# Altium PCB ExpansionBoard.PcbDoc
Units mil, origin at the board's own origin, x right, y up, seen from the top; angles counter-clockwise.
Board outline 2512.03 x 2180.03 mil, 4 copper layers (Top Layer, Mid-GND, Mid-PWR, Bottom Layer), stack 63.5 mil thick; 78 components, 50 nets, 306 pads, 103 vias.
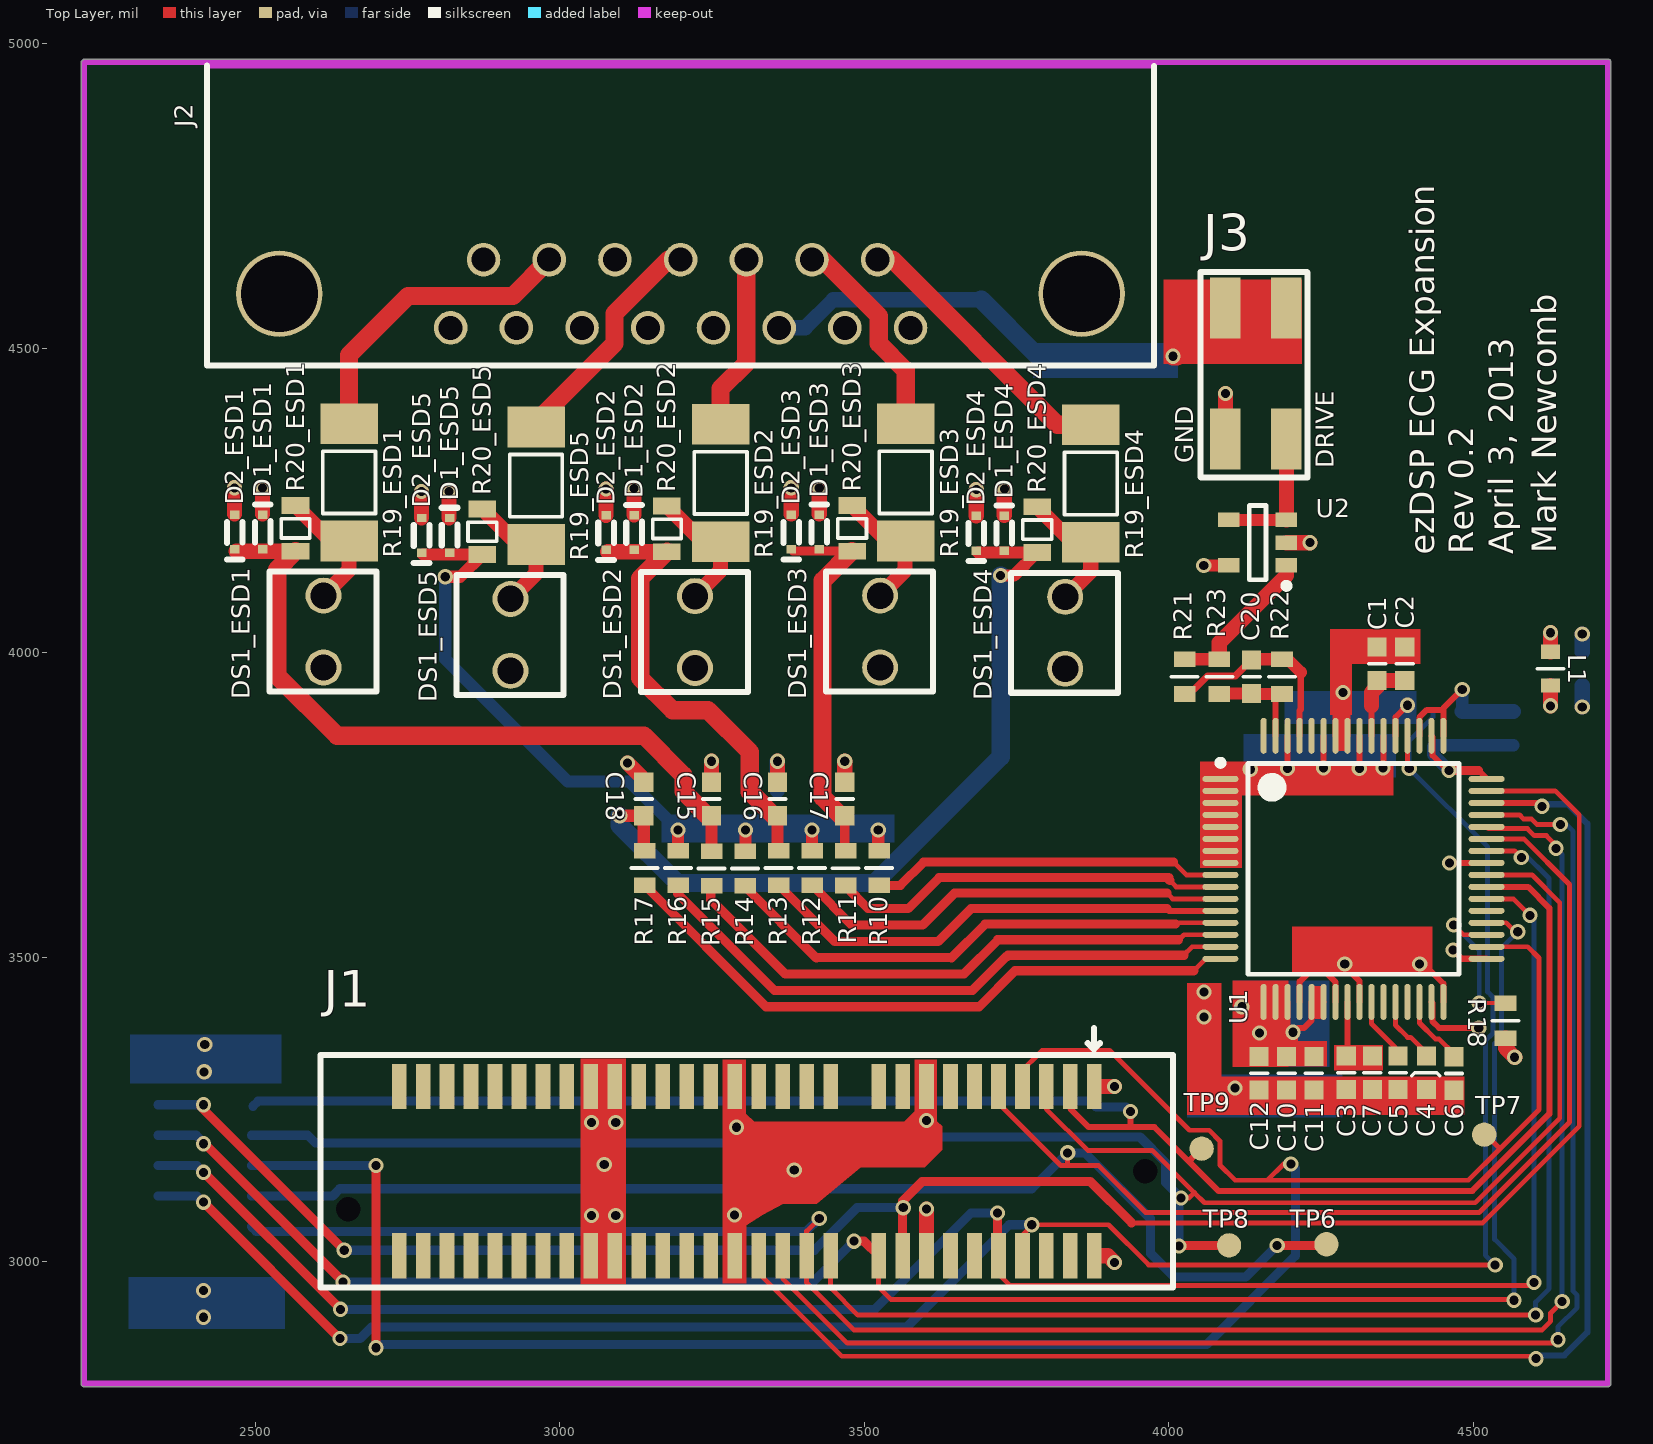
[diagram p0: Top Layer view]
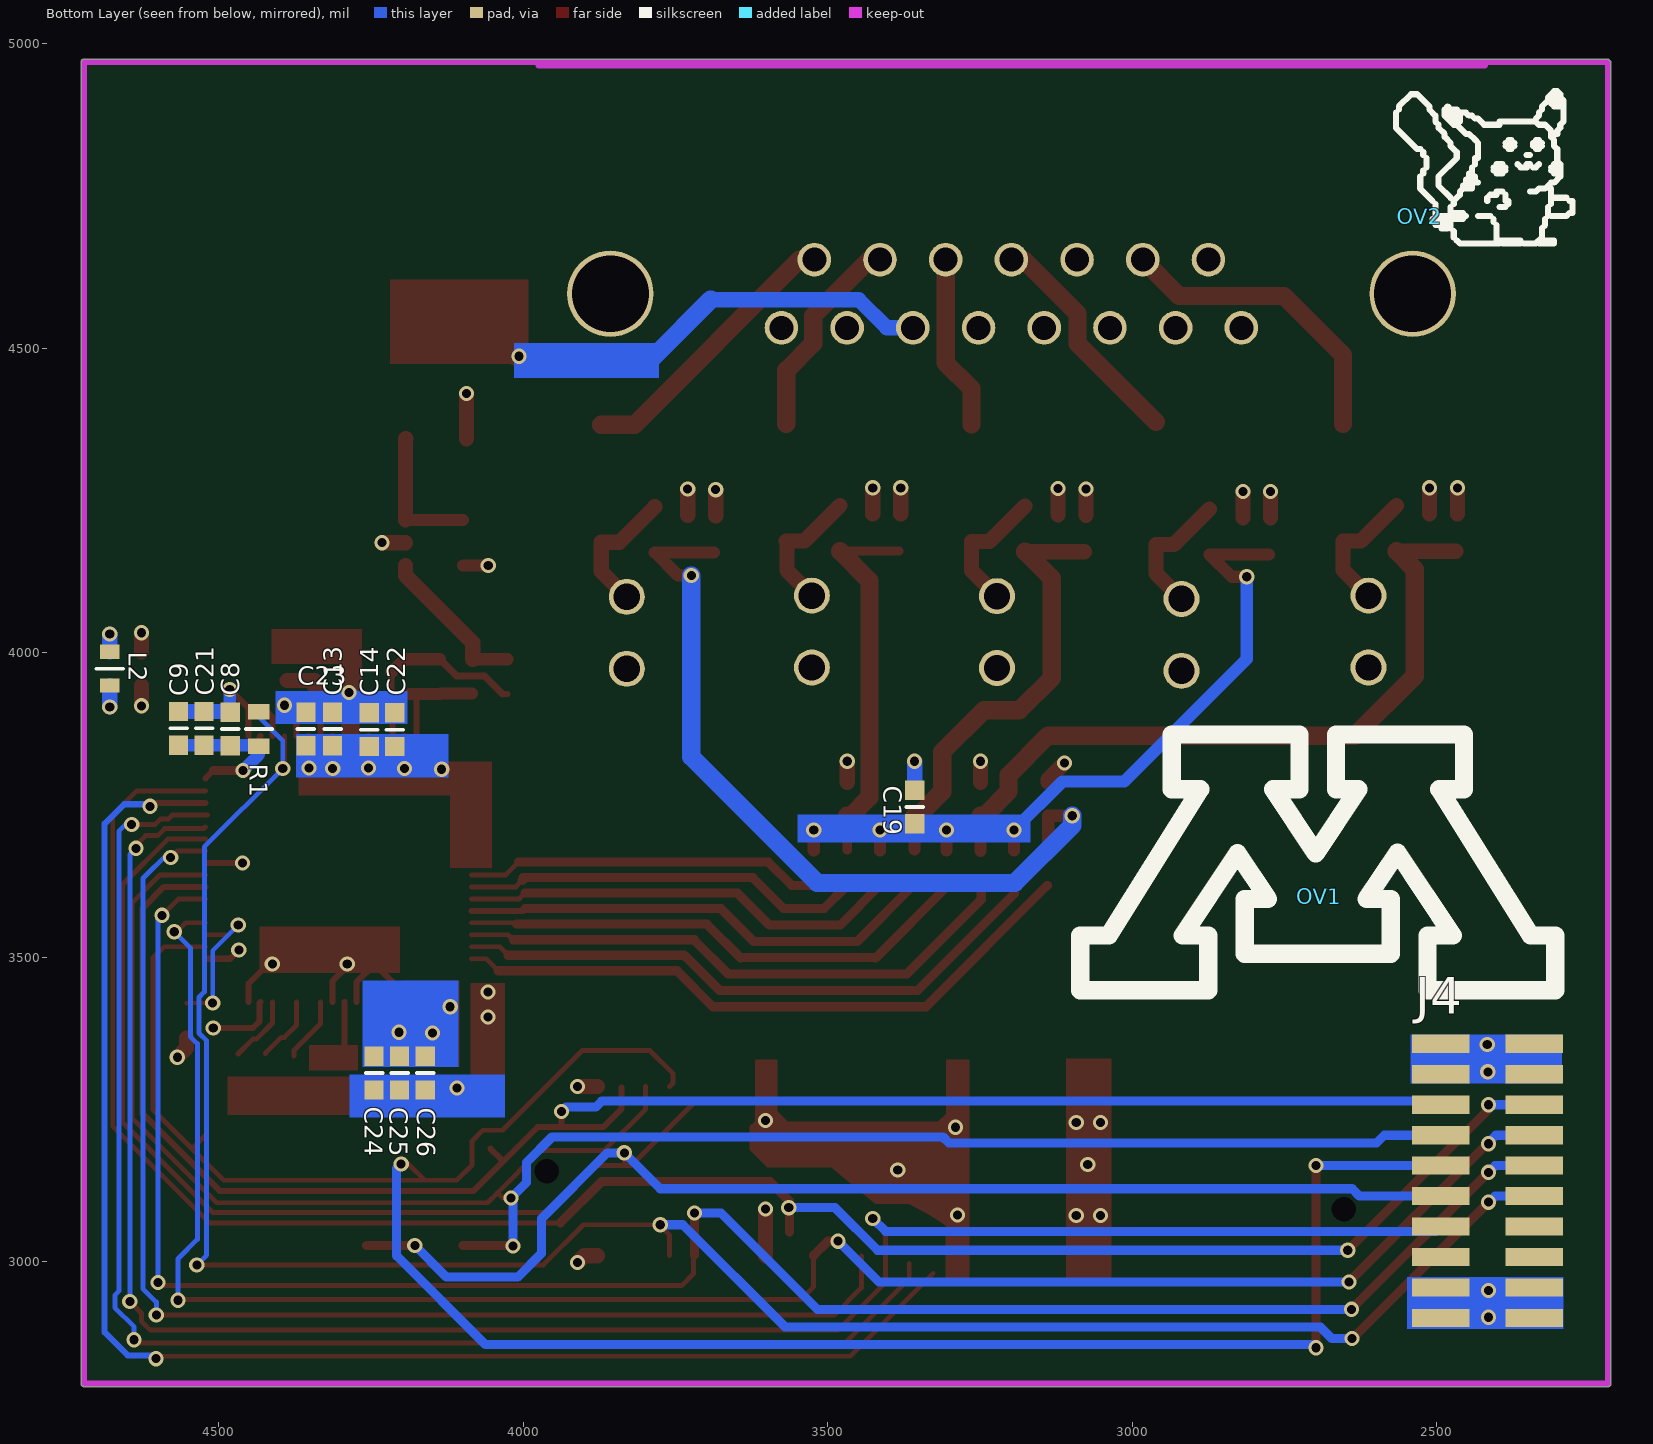
[diagram p1: Bottom Layer view, seen from below]
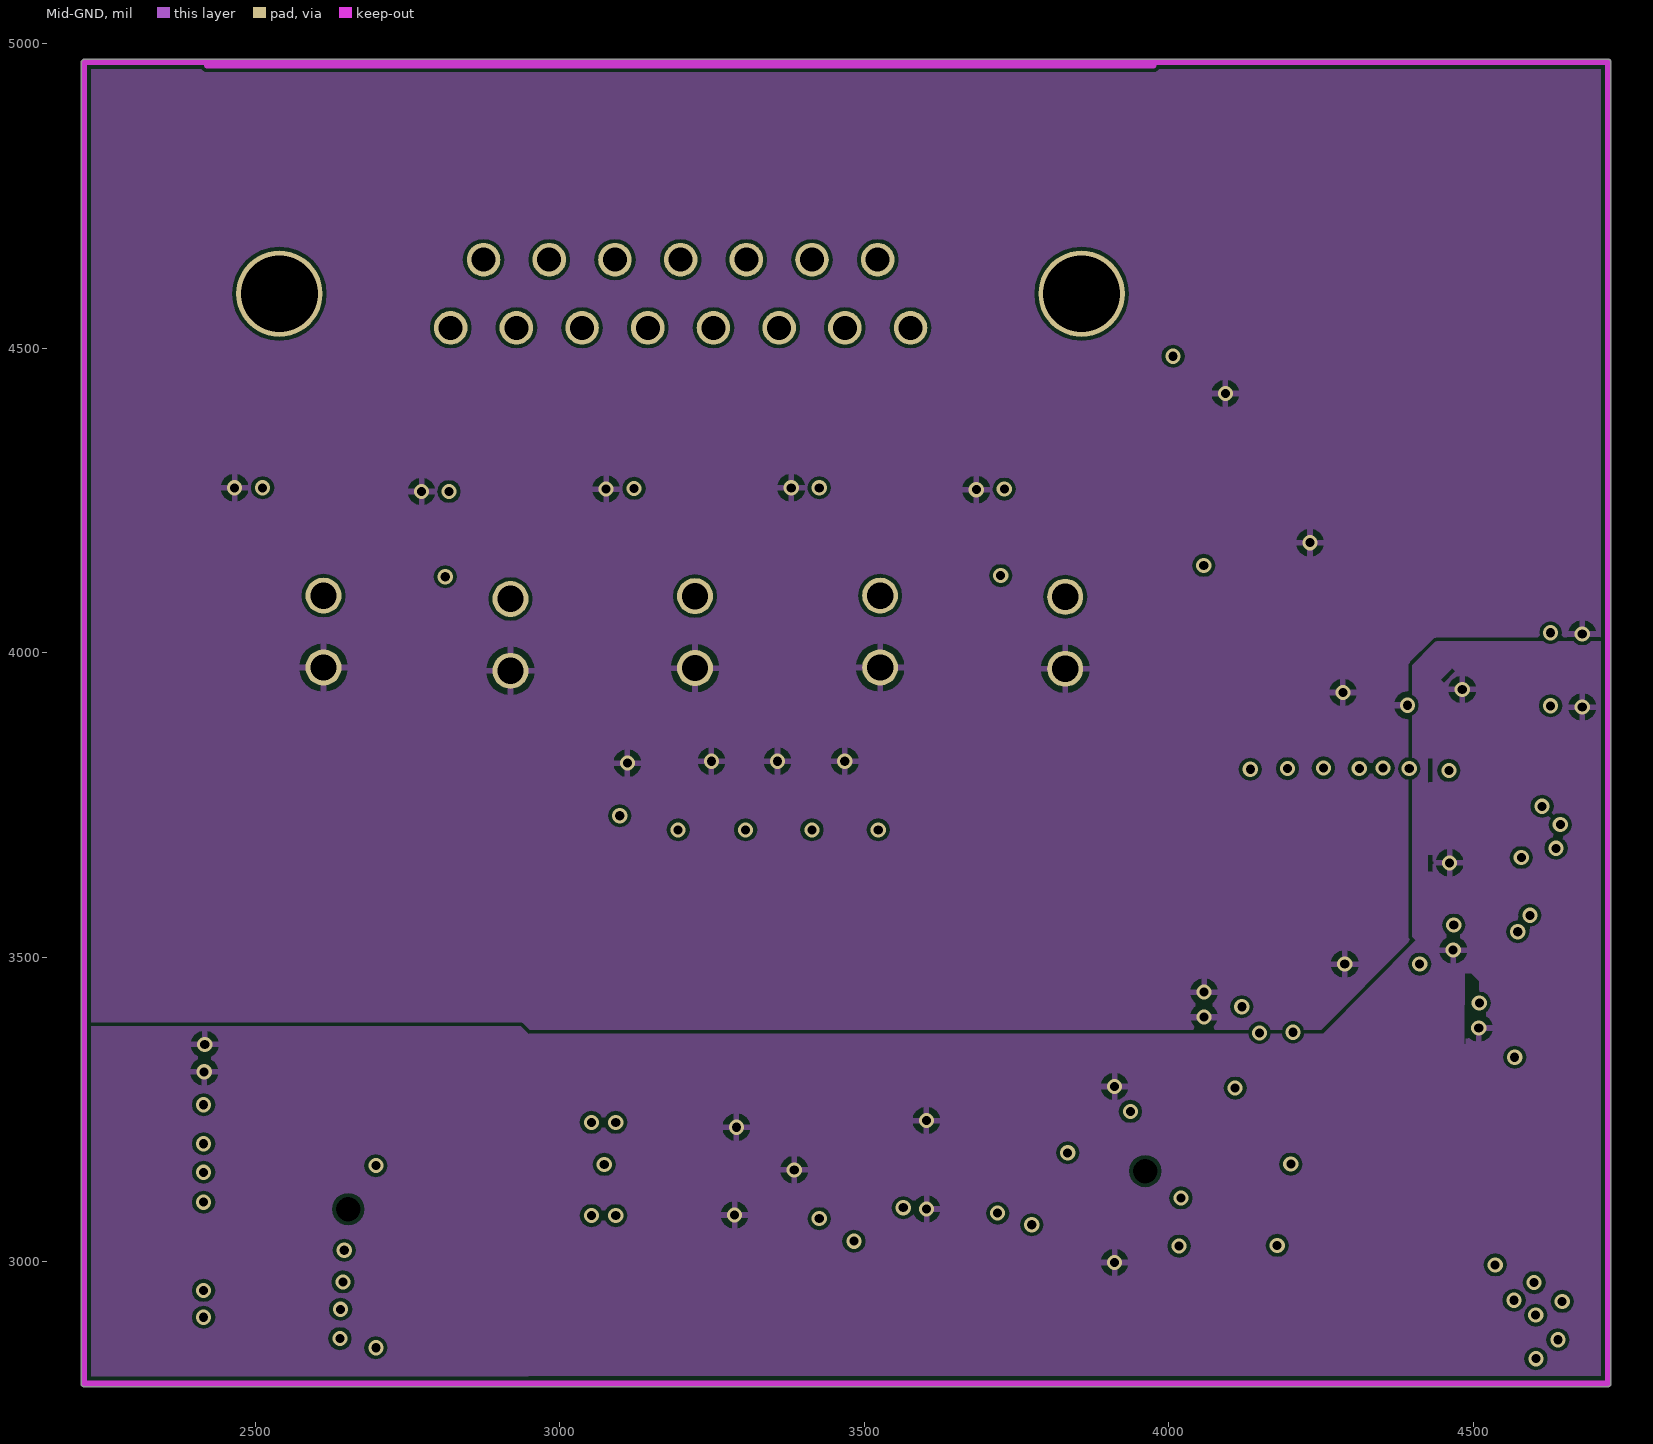
[diagram p2: Mid-GND]
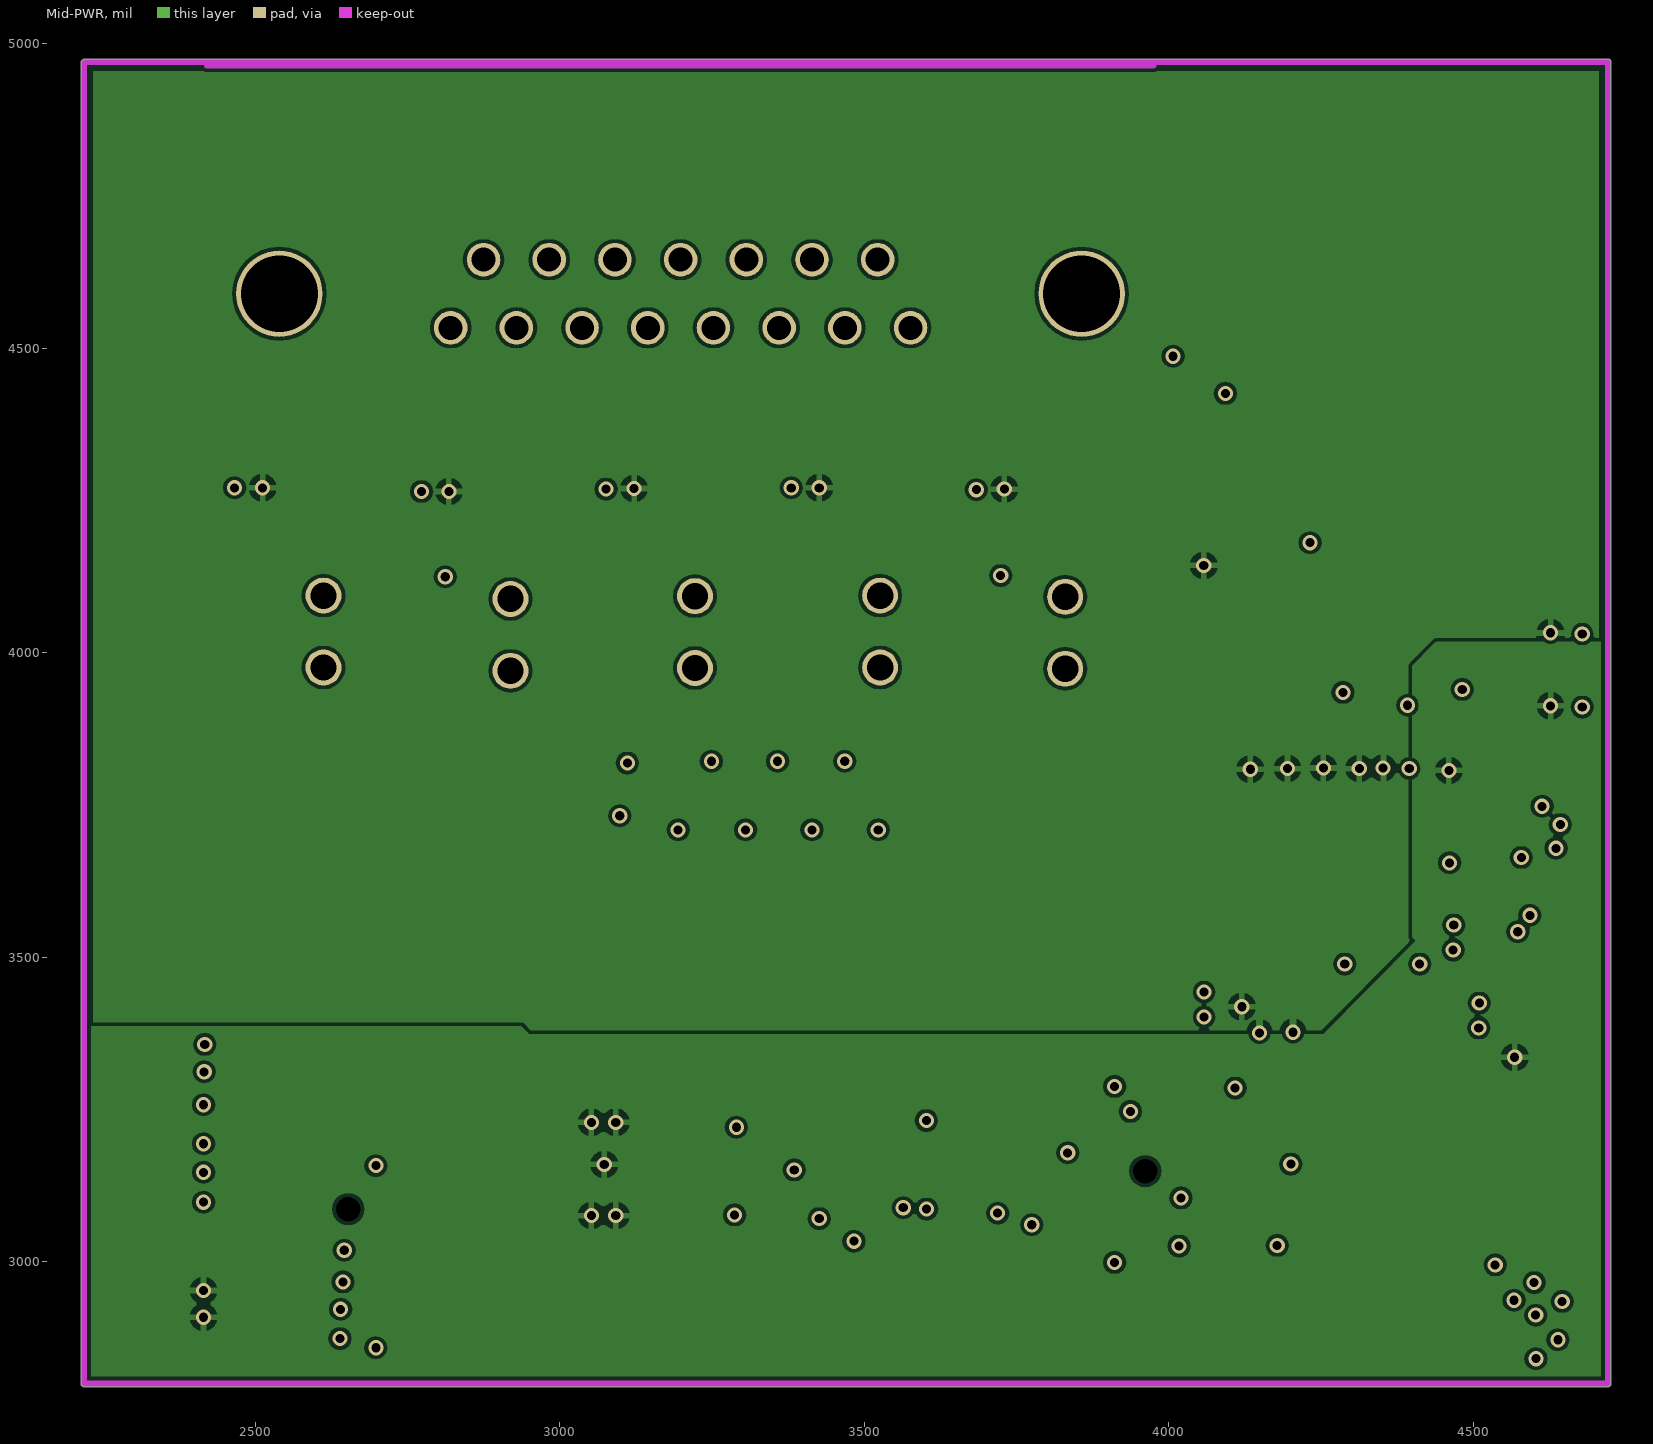
[diagram p3: Mid-PWR]

## Layer stack, top to bottom
Top Layer: signal copper 1.35
Dielectric: core 9.3, FR-4, Dk 4.8
Mid-GND: signal copper 1.35
Dielectric: prepreg 39, FR-4, Dk 4.8
Mid-PWR: signal copper 1.35
Dielectric: core 9.8, FR-4, Dk 4.8
Bottom Layer: signal copper 1.35

## Board outline
2213.99,2800 2213.99,4969 cw(c2219,4969) 2215.99,4973.01 cw(c2220,4970) 2220,4975.02 4721,4975.02 cw(c4721,4970) 4726.02,4970 4726.02,2800 cw(c4721,2800) 4721,2794.99 2219,2794.99 cw(c2219,2800)

## Design rules (kind name [scope] priority, off if disabled: settings)
Clearance Clearance_1 [All] p1: gap=6
Clearance TQFP_64_Rule [HasFootprint('TQFP_64_HD') vs HasFootprint('TQFP_64_HD')] p2: gap=4
Clearance "Polygon Pour" [(IsRegion AND InNet('AGND') AND OnLayer('Mid-GND')) vs (IsRegion AND InNet('DGND') AND OnLayer('Mid-GND'))] p3: gap=15
HoleSize [All] p1: absolutevalues=TRUE maxlimit=100 minlimit=15 maxpercent=80.000 minpercent=20.000
MinimumAnnularRing [All] p1: minimumring=5
PolygonConnect [All] p1: connectstyle=Relief reliefconductorwidth=10 reliefentries=4 polygonreliefangle="90 Angle" airgapwidth=10
RoomDefinition ESD5 [InComponentClass('ESD5')] p1: confinementstyle=ConfineIn formatcopy=TRUE lockcomponents=FALSE outline 2732.5,3912.54 3016.5,3912.54 3016.5,4432.54 2732.5,4432.54
RoomDefinition ESD4 [InComponentClass('ESD4')] p2: confinementstyle=ConfineIn formatcopy=TRUE lockcomponents=FALSE outline 3646,3916 3930,3916 3930,4436 3646,4436
RoomDefinition ESD3 [InComponentClass('ESD3')] p3: confinementstyle=ConfineIn formatcopy=TRUE lockcomponents=FALSE outline 3341.5,3918 3625.5,3918 3625.5,4438 3341.5,4438
RoomDefinition ESD2 [InComponentClass('ESD2')] p4: confinementstyle=ConfineIn formatcopy=TRUE lockcomponents=FALSE outline 3037,3917.14 3321,3917.14 3321,4437.14 3037,4437.14
RoomDefinition ESD1 [InComponentClass('ESD1')] p5: confinementstyle=ConfineIn formatcopy=TRUE lockcomponents=FALSE outline 2428,3918 2712,3918 2712,4438 2428,4438
RoutingVias [All] p1: holewidth=28 width=50 viastyle="Through Hole" minholewidth=28 minwidth=50 maxholewidth=28 maxwidth=50
SilkToSolderMaskClearance SilkscreenOverComponentPads [IsPad] p1: minsilkscreentomaskgap=10 clearancetoexposedcopper=TRUE
SolderMaskExpansion [All] p1: expansion=4
Width [All] p1: maxlimit=60 minlimit=6 preferedwidth=10
26 further rules are at their usual default settings.

## Classes and differential pairs
channel class LeadESDProtection: ESD1 ESD2 ESD3 ESD4 ESD5
net class LEADIN_EXT[1..5]: LEADIN_EXT1 LEADIN_EXT2 LEADIN_EXT3 LEADIN_EXT4 LEADIN_EXT5
net class LEADIN[1..5]: LEADIN1 LEADIN2 LEADIN3 LEADIN4 LEADIN5
component class Root: J1 J2 J3 J4 L1 L2 OV1 OV2 TP6 TP7 TP8 TP9
component class LEADS: C15 C16 C17 C18 C19
component class ESD5: D1_ESD5 D2_ESD5 DS1_ESD5 R19_ESD5 R20_ESD5
component class ESD4: D1_ESD4 D2_ESD4 DS1_ESD4 R19_ESD4 R20_ESD4
component class ESD3: D1_ESD3 D2_ESD3 DS1_ESD3 R19_ESD3 R20_ESD3
component class ESD2: D1_ESD2 D2_ESD2 DS1_ESD2 R19_ESD2 R20_ESD2
component class ESD1: D1_ESD1 D2_ESD1 DS1_ESD1 R19_ESD1 R20_ESD1
component class ACQ: C1 C2 C3 C4 C5 C6 C7 C8 C9 C10 C11 C12 C13 C14 C20 C21 C22 C23 C24 C25 C26 R1 R10 R11 R12 R13 R14 R15 R16 R17 R18 R21 R22 R23 U1 U2

## Components (designator, comment, footprint, x,y, rotation, side; value= is the part's Value field where it differs from the comment)
C1 "CAP_GEN" CAP_0603 4342.23,3982.34 r90 top
C2 "CAP_GEN" CAP_0603 4387.63,3982.34 r90 top
C3 "CAP_GEN" CAP_0603 4291.43,3310.34 r90 top
C4 "CAP_GEN_POLAR" CAP_0603_POLAR 4423.43,3310.34 r270 top
C5 "CAP_GEN" CAP_0603 4376.43,3310.34 r90 top
C6 "CAP_GEN" CAP_0603 4468.43,3309.34 r90 top
C7 "CAP_GEN" CAP_0603 4334.43,3310.34 r90 top
C8 "CAP_GEN" CAP_0603 4481,3875 r270 bottom
C9 "CAP_GEN" CAP_0603 4566,3876 r270 bottom
C10 "CAP_GEN" CAP_0603 4193.43,3309.78 r90 top
C11 "CAP_GEN" CAP_0603 4238.43,3309.78 r90 top
C12 "CAP_GEN" CAP_0603 4148.43,3309.78 r90 top
C13 "CAP_GEN" CAP_0603 4313,3875 r270 bottom
C14 "CAP_GEN" CAP_0603 4253,3874 r270 bottom
C15 "CAP CER 1200PF 50V 10% X7R 0603" CAP_0603 3249,3760 r270 top
C16 "CAP CER 1200PF 50V 10% X7R 0603" CAP_0603 3357.56,3760 r270 top
C17 "CAP CER 1200PF 50V 10% X7R 0603" CAP_0603 3468,3760 r270 top
C18 "CAP CER 1200PF 50V 10% X7R 0603" CAP_0603 3138,3760 r270 top
C19 "CAP CER 1200PF 50V 10% X7R 0603" CAP_0603 3357,3747 r270 bottom
C20 "CAP_GEN" CAP_0603 4136,3961 r90 top
C21 "CAP_GEN" CAP_0603 4524,3876 r270 bottom
C22 "CAP_GEN" CAP_0603 4211,3874 r270 bottom
C23 "CAP_GEN" CAP_0603 4357,3875 r270 bottom
C24 "CAP_GEN" CAP_0603 4245,3310 r90 bottom
C25 "CAP_GEN" CAP_0603 4203,3310 r90 bottom
C26 "CAP_GEN" CAP_0603 4161,3310 r90 bottom
D1_ESD1 "VESD03-02V-G-08" SOD-523 2512,4198.46 r270 top (schematic designator D1)
D1_ESD2 "VESD03-02V-G-08" SOD-523 3122,4197.6 r270 top (schematic designator D1)
D1_ESD3 "VESD03-02V-G-08" SOD-523 3426,4198.46 r270 top (schematic designator D1)
D1_ESD4 "VESD03-02V-G-08" SOD-523 3730,4196.46 r270 top (schematic designator D1)
D1_ESD5 "VESD03-02V-G-08" SOD-523 2819,4193 r270 top (schematic designator D1)
D2_ESD1 "VESD03-02V-G-08" SOD-523 2466,4198.46 r90 top (schematic designator D2)
D2_ESD2 "VESD03-02V-G-08" SOD-523 3076,4197.6 r90 top (schematic designator D2)
D2_ESD3 "VESD03-02V-G-08" SOD-523 3380,4198.46 r90 top (schematic designator D2)
D2_ESD4 "VESD03-02V-G-08" SOD-523 3684,4196.46 r90 top (schematic designator D2)
D2_ESD5 "VESD03-02V-G-08" SOD-523 2773,4193 r90 top (schematic designator D2)
DS1_ESD1 "MC08010000" MC08010000 2612,4035 r90 top (schematic designator DS1)
DS1_ESD2 "MC08010000" MC08010000 3222,4034.14 r90 top (schematic designator DS1)
DS1_ESD3 "MC08010000" MC08010000 3526,4035 r90 top (schematic designator DS1)
DS1_ESD4 "MC08010000" MC08010000 3830,4033 r90 top (schematic designator DS1)
DS1_ESD5 "MC08010000" MC08010000 2919,4029.54 r90 top (schematic designator DS1)
J1 "MEC1-130-02-S-D-A" MEC1-130-02-S-D-A 3307,3149 r180 top
J2 "10090099-S154VLF" 10090099-S154VLF 3198.43,4589.76 r0 top
J3 "95278-101A04LF" 95278-101A04LF 4143,4459 r180 top
J4 "20021121-00020C4LF" 20021121-00020C4LF 2340,2908 r90 bottom
L1 "IND_GEN" IND_0603 4627,3974 r270 top
L2 "IND_GEN" IND_0603 4679,3974 r270 bottom
OV1 "MINNESOTA_OVERLAY" Minnesota 2693,3600 r180 bottom
OV2 "PIKACHU_OVERLAY" PIKACHU 2528,4717 r180 bottom
R1 "RES_GEN" RES_0603 4434,3875 r270 bottom
R10 "RES_GEN" RES_0603 3524.34,3646.79 r270 top
R11 "RES_GEN" RES_0603 3469.34,3646.55 r270 top
R12 "RES_GEN" RES_0603 3414.34,3646.79 r270 top
R13 "RES_GEN" RES_0603 3359.34,3646.79 r270 top
R14 "RES_GEN" RES_0603 3304.34,3646 r270 top
R15 "RES_GEN" RES_0603 3249.34,3646 r270 top
R16 "RES_GEN" RES_0603 3194.34,3646.79 r270 top
R17 "RES_GEN" RES_0603 3139.34,3646.79 r270 top
R18 "RES_GEN" RES_0603 4553,3396 r90 top
R19_ESD1 "RES_GEN" RES_MELF_0207 2654,4280 r270 top (schematic designator R19)
R19_ESD2 "RES_GEN" RES_MELF_0207 3264,4279.14 r270 top (schematic designator R19)
R19_ESD3 "RES_GEN" RES_MELF_0207 3568,4280 r270 top (schematic designator R19)
R19_ESD4 "RES_GEN" RES_MELF_0207 3872,4278 r270 top (schematic designator R19)
R19_ESD5 "RES_GEN" RES_MELF_0207 2961,4274.54 r270 top (schematic designator R19)
R20_ESD1 "RES_GEN" RES_0805_PW 2566,4204.46 r270 top (schematic designator R20)
R20_ESD2 "RES_GEN" RES_0805_PW 3176,4203.6 r270 top (schematic designator R20)
R20_ESD3 "RES_GEN" RES_0805_PW 3480,4204.46 r270 top (schematic designator R20)
R20_ESD4 "RES_GEN" RES_0805_PW 3784,4202.46 r270 top (schematic designator R20)
R20_ESD5 "RES_GEN" RES_0805_PW 2873,4199 r270 top (schematic designator R20)
R21 "RES_GEN" RES_0603 4026,3961 r270 top
R22 "RES_GEN" RES_0603 4186,3961 r90 top
R23 "RES_GEN" RES_0603 4083,3961 r270 top
TP6 "TEST_PT_40MIL" TP_40MIL 4259,3029 r90 top
TP7 "TEST_PT_40MIL" TP_40MIL 4518,3209 r90 top
TP8 "TEST_PT_40MIL" TP_40MIL 4099,3027 r90 top
TP9 "TEST_PT_40MIL" TP_40MIL 4054,3186 r90 top
U1 "ADS1294_TQFP" TQFP_64_HD 4303.43,3645.34 r0 top
U2 "LMV321" SOT23_5 4146,4181 r180 top

## Footprints (in the part's own frame and the unit in brackets; to place one, negate y for a bottom-side part, rotate by r counter-clockwise, add the part's x,y. Pads: shape width x height; smd on the part's side, far side on the other; paste and mask are expansions set on the pad)
95278-101A04LF [mm] "CONN HEADER 4POS .100\" DL SMD"
  rect 1.27x2.54 smd: 1(1.27,-2.73) 2(1.27,2.73) 3(-1.27,2.73) 4(-1.27,-2.73)
  silkscreen extent -2.15,-4.23 2.3,4.35
10090099-S154VLF [mm] "CONN DSUB RCPT 15POS R/A GOLD"
  round 3.6 hole 3.2: 0(-16.735,0) 0(16.725,0)
  round 1.4 hole 1: 1(-9.59,-1.42) 2(-6.85,-1.42) 3(-4.11,-1.42) 4(-1.37,-1.42) 5(1.37,-1.42) 6(4.11,-1.42) 7(6.85,-1.42) 8(9.59,-1.42) 9(-8.22,1.42) 10(-5.48,1.42) 11(-2.74,1.42) 12(0,1.42) 13(2.74,1.42) 14(5.48,1.42) 15(8.22,1.42)
  Keep-Out Layer lines w0.254: -19.75,9.525 19.72,9.525
  silkscreen extent -19.75,-3 19.74,9.53, body extent -19.62,-2.92 19.62,15.28, height 12.53
20021121-00020C4LF [mm] "CONN HEADER 20POS DL UNSHRD SMD"
  rect 0.76x2.4 smd: 1(0,0) 2(0,3.9) 3(1.27,0) 4(1.27,3.9) 5(2.54,0) 6(2.54,3.9) 7(3.81,0) 8(3.81,3.9) 9(5.08,0) 10(5.08,3.9) 11(6.35,0) 12(6.35,3.9) 13(7.62,0) 14(7.62,3.9) 15(8.89,0) 16(8.89,3.9) 17(10.16,0) 18(10.16,3.9) 19(11.43,0) 20(11.43,3.9)
CAP_0603 [mm]
  rect 0.8x0.8 smd: 1(-0.7,0) 2(0.7,0)
  silkscreen extent 0,-0.35 0,0.35, body extent -0.8,-0.4 0.8,0.4, height 0.45
CAP_0603_POLAR [mm]
  rect 0.8x0.8 smd: 1(-0.7,0) 2(0.7,0)
  silkscreen extent 0,-0.63 0.13,0.55, body extent -0.8,-0.4 0.8,0.4, height 0.45
IND_0603 [mm]
  rect 0.6x0.8 smd: 1(-0.7,0) 2(0.7,0)
  silkscreen extent 0,-0.55 0,0.55, body extent -0.8,-0.4 0.8,0.4, height 0.45
MC08010000 [mm]
  round 1.5 hole 1.1: 1(-1.5,0) 2(1.5,0)
  silkscreen extent -2.5,-2.21 2.5,2.26, body extent -2,-1.98 2,2, height 12.5
MEC1-130-02-S-D-A [mil] "CONN EDGE CARD DL 1MM 60POS SMD"
  rect 24x74 smd mask+2: 1(-570.87,-139) 2(-570.87,139) 3(-531.5,-139) 4(-531.5,139) 5(-492.13,-139) 6(-492.13,139) 7(-452.76,-139) 8(-452.76,139) 9(-413.39,-139) 10(-413.39,139) 11(-374.02,-139) 12(-374.02,139) 13(-334.65,-139) 14(-334.65,139) 15(-295.28,-139) 16(-295.28,139) 17(-255.91,-139) 18(-255.91,139) 19(-216.54,-139) 20(-216.54,139) 23(-137.8,-139) 24(-137.8,139) 25(-98.43,-139) 26(-98.43,139) 27(-59.06,-139) 28(-59.06,139) 29(-19.69,-139) 30(-19.69,139) 31(19.68,-139) 32(19.68,139) 33(59.05,-139) 34(59.05,139) 35(98.42,-139) 36(98.42,139) 37(137.79,-139) 38(137.79,139) 39(177.16,-139) 40(177.16,139) 41(216.53,-139) 42(216.53,139) 43(255.9,-139) 44(255.9,139) 45(295.27,-139) 46(295.27,139) 47(334.64,-139) 48(334.64,139) 49(374.01,-139) 50(374.01,139) 51(413.38,-139) 52(413.38,139) 53(452.75,-139) 54(452.75,139) 55(492.12,-139) 56(492.12,139) 57(531.49,-139) 58(531.49,139) 59(570.86,-139) 60(570.86,139)
  round 0 hole 40 unplated: 61(-654.42,0) 62(654.42,62.5)
  silkscreen extent -700,-235 700,191, body extent -680,-170 680,165, height 356
Minnesota [mil]
  silkscreen extent -392,-154 388,266
PIKACHU [mil]
  silkscreen extent -39,-45 251,205
RES_0603 [mm]
  rect 0.65x0.9 smd: 1(-0.725,0) 2(0.725,0)
  silkscreen extent 0,-0.55 0,0.55, body extent -0.8,-0.4 0.8,0.4, height 0.45
RES_0805_PW [mm] "Pulse Withstanding 0805"
  rect 0.7x1.15 smd: 1(-0.95,0) 2(0.95,0)
  silkscreen extent -0.4,-0.6 0.4,0.6, body extent -1,-0.63 1,0.63, height 0.55
RES_MELF_0207 [mm]
  rect 1.7x2.4 smd: 1(-2.45,0) 2(2.45,0)
  silkscreen extent -1.3,-1.1 1.3,1.1, body extent -2.9,-1.1 2.9,1.1, height 2.19
SOD-523 [mm]
  rect 0.35x0.4 smd: 1(0.725,0) 2(-0.725,0)
  silkscreen extent -1.15,-0.33 0.43,0.33, body extent -0.65,-0.45 0.65,0.45, height 0.7
SOT23_5 [mm] "SOT23, 5-Leads, Body 2.90x2.80mm, Pitch 0.95mm, IPC High Density"
  rect 0.9x0.6 smd: 1(-1.2,0.95) 2(-1.2,0) 3(-1.2,-0.95) 4(1.2,-0.95) 5(1.2,0.95)
  silkscreen extent -1.33,-1.55 0.35,1.92, body extent -0.87,-1.52 0.87,1.53, height 1.45
TP_40MIL [mil] "40mil Diameter Test Point"
  round 40 smd: 1(0,0)
TQFP_64_HD [mm] "TSQFP, 64-Leads, Body 12.2x12.2mm (max), Pitch 0.50mm, IPC High Density"
  oval 1.5x0.25 smd: 1(-5.55,3.75) 2(-5.55,3.25) 3(-5.55,2.75) 4(-5.55,2.25) 5(-5.55,1.75) 6(-5.55,1.25) 7(-5.55,0.75) 8(-5.55,0.25) 9(-5.55,-0.25) 10(-5.55,-0.75) 11(-5.55,-1.25) 12(-5.55,-1.75) 13(-5.55,-2.25) 14(-5.55,-2.75) 15(-5.55,-3.25) 16(-5.55,-3.75) 33(5.55,-3.75) 34(5.55,-3.25) 35(5.55,-2.75) 36(5.55,-2.25) 37(5.55,-1.75) 38(5.55,-1.25) 39(5.55,-0.75) 40(5.55,-0.25) 41(5.55,0.25) 42(5.55,0.75) 43(5.55,1.25) 44(5.55,1.75) 45(5.55,2.25) 46(5.55,2.75) 47(5.55,3.25) 48(5.55,3.75)
  oval 0.25x1.5 smd: 17(-3.75,-5.55) 18(-3.25,-5.55) 19(-2.75,-5.55) 20(-2.25,-5.55) 21(-1.75,-5.55) 22(-1.25,-5.55) 23(-0.75,-5.55) 24(-0.25,-5.55) 25(0.25,-5.55) 26(0.75,-5.55) 27(1.25,-5.55) 28(1.75,-5.55) 29(2.25,-5.55) 30(2.75,-5.55) 31(3.25,-5.55) 32(3.75,-5.55) 49(3.75,5.55) 50(3.25,5.55) 51(2.75,5.55) 52(2.25,5.55) 53(1.75,5.55) 54(1.25,5.55) 55(0.75,5.55) 56(0.25,5.55) 57(-0.25,5.55) 58(-0.75,5.55) 59(-1.25,5.55) 60(-1.75,5.55) 61(-2.25,5.55) 62(-2.75,5.55) 63(-3.25,5.55) 64(-3.75,5.55)
  silkscreen extent -5.67,-4.4 4.4,4.55, body extent -5,-5 5,5, height 1.2

## Part data
C1 C3 C8 C9 C10 C11 C12 C13 C14: "Generic Capacitor"
C2 C5 C6: "CAP CER 1UF 10V Y5V 0603"
C4: "CAP TANT 22UF 6.3V 20% 0603"
C7: "CAP CER 10UF 6.3V 20% X5R 0603"
C15 C16 C17 C18 C19: library part CAP_GEN, "CAP CER 10000PF 50V 10% X7R 0603"
C20: "CAP CER 10000PF 50V 10% X7R 0603"
C21 C22 C23 C24 C25 C26: "CAP CER 1UF 10V 10% X5R 0603"
D1_ESD1 D1_ESD2 D1_ESD3 D1_ESD4 D1_ESD5 D2_ESD1 D2_ESD2 D2_ESD3 D2_ESD4 D2_ESD5: "TVS DIODE 3V 108W SOD523"
DS1_ESD1 DS1_ESD2 DS1_ESD3 DS1_ESD4 DS1_ESD5: "LAMP, NEON, T-1 1/4, WIRE"
J1: "CONN EDGE CARD DL 1MM 60POS SMD"
J2: "CONN DSUB RCPT 15POS R/A GOLD"
J3: "CONN HEADER 4POS .100\" DL SMD"
J4: "CONN HEADER 20POS DL UNSHRD SMD"
L1 L2: "Generic Inductor"
OV1: "UOFM OVERLAY"
OV2: "PIKACHU BOTTOM OVERLAY"
R1 R18: "RES 47K OHM 1/10W 5% 0603 SMD"
R10 R11 R12 R13 R14 R15 R16 R17 R21 R23: "RES 0.0 OHM 0.1W JUMPER 0603 SMD"
R19_ESD1 R19_ESD2 R19_ESD3 R19_ESD4 R19_ESD5: "RES 20K OHM 1W 2% 0207 MELF"
R20_ESD1 R20_ESD2 R20_ESD3 R20_ESD4 R20_ESD5: "RES 10K OHM 1/4W 0.1% 0805"
R22: "Generic Resistor"
TP6 TP7 TP8 TP9: "40MIL DIAM TEST POINT"
U1: "IC AFE 24BIT 32KSPS 4CH 64TQFP"
U2: "IC OPAMP GP R-R 1MHZ SGL SOT23-5"

## Via types
v1: diameter 25, hole 15, Top Layer to Bottom Layer, 103 vias

## Nets (pads, with @x,y where several pads share a name; then routed paths per layer and width w, separated by ;. In a path a pad name is that pad's centre, name@x,y a point inside that pad or via, vN(x,y) a via of type N, cw(c..) or ccw(c..) an arc to the next point about the centre after c; other vN are vias at no path point)
#CN_SPI_CS: J1.3 J4.16 TP9.1 U1.39 | length 2886.6
  Top Layer w10: J1.3@3838.5,3286.5 3838.5,3251.5 3868.63,3221.37 3937,3221.37 ; v1(3937,3247) 3937,3221.37 ; 4036.94,3168.94 TP9.1 ; U1.39 4590.19,3615.81 4625,3581 4625,3243 4498.5,3116.5 4081.5,3116.5 3976.63,3221.37 3937,3221.37
  Bottom Layer w15: J4.16@2496.04,3255.5 2504.54,3264 3871,3264 3881,3254 3930,3254 v1(3937,3247)
#ECG_DRDY: J1.18 J4.15 U1.47 | length 3294.8
  Top Layer w8: 3939,3064 4515.3,3064 4674,3222.7 4674,3734 4634.71,3773.29 U1.47
  Top Layer w15: v1@2411,3254 v1(2646,3019) ; 3562.91,3049.37 3562.91,3099.91 3595,3132 3871,3132 3939,3064
  Bottom Layer w15: J4.15 v1@2407,3258 ; v1(2646,3019) 3418,3019 3488,3089 v1(3564,3089)
  other v1: 2415,3258
#ECG_RESET: J1.20 J4.13 U1.36 | length 3116.1
  Top Layer w8: J1.20 3523.54,2958.46 3544,2938 4566,2938 v1(4567,2937) ; U1.36 4554.24,3556.76 4569,3542 v1(4573,3542)
  Top Layer w15: v1@2417,3194 v1(2644,2967) ; v1(3483,3034) 3499.54,3034 J1.20
  Bottom Layer w8: v1(4567,2937) 4567,3005 4535,3037 4535,3358.38 4546.5,3369.88 4546.5,3515.5 v1(4573,3542)
  Bottom Layer w15: J4.13 2403,3208 v1@2417,3194 ; v1(2644,2967) 3416,2967 v1(3483,3034)
  other v1: 2415,3194
ADC_CLK_SEL: J1.8 J4.9 R1.1 U1.52 | length 3502.1
  Top Layer w8: J1.8 3759.76,3043.76 3777,3061 3901,3061 3967,2995 v1(4536,2995) ; U1.52 4392.01,3812.99 v1(4395,3810)
  Top Layer w15: v1(2415,3098) v1(2639,2874) ; v1@2638.5,2873.5 v1@2639,2873
  Bottom Layer w8: R1.1 4434,3895 4395,3856 v1(4395,3810) 4523.5,3681.5 4523.5,3443.32 4532.5,3434.32 4532.5,3375.68 4520,3363.18 4520,3011 v1(4536,2995)
  Bottom Layer w15: J4.9 2404,3108 v1@2414,3098 ; v1(2639,2874) 2672,2874 2691,2893 3570,2893 3738,3061 v1(3775,3061)
AGND: C1.2 C2.2 C3.1 C4.2 C5.1 C6.1 C7.1 C10.1 C11.1 C12.1 C13.1 C14.1 C15.1 C16.1 C17.1 C18.1 C19.1 C22.1 C23.1 C24.1 C25.1 C26.1 D2_ESD1.1 D2_ESD2.1 D2_ESD3.1 D2_ESD4.1 D2_ESD5.1 DS1_ESD1.1 DS1_ESD2.1 DS1_ESD3.1 DS1_ESD4.1 DS1_ESD5.1 J3.2 L2.1 U1.20 U1.23 U1.25 U1.32 U1.53 U1.57 U1.58 U2.2 | length 2100.7
  Top Layer w10: U1.20 4215,3426.99 4215,3460 4244,3489 4273.9,3459.1 U1.23 ; U1.58 4273.9,3922.9 v1(4286,3935) 4293.58,3927.42 U1.57 ; v1@4285,3489 4313.27,3460.73 U1.25 ; U1.53 4372.32,3894.32 v1(4392,3914) ; v1@4419.16,3489 4451.06,3457.1 U1.32
  Top Layer w20: 4244,3489 4285,3489 v1@4419.16,3489
  Top Layer w25: D2_ESD1.1@2466,4228 v1(2466,4271) ; D2_ESD5.1@2773,4222 v1(2773,4265) ; D2_ESD2.1@3076,4226 v1(3076,4269) ; v1(3111,3819) 3138,3792 C18.1 ; C15.1 v1(3249,3822) ; C16.1 v1(3357.56,3822) ; D2_ESD3.1@3380,4228 v1(3380,4271) ; C17.1 v1(3468,3822) ; D2_ESD4.1 v1(3684,4268) ; J3.2 v1(4093,4426) ; v1(4109,3285.44) 4112.22,3282.22 C12.1 ; C12.1@4157.43,3282.22 C10.1 C6.1@4467.98,3282.22 ; U2.2 v1(4232,4181) ; v1(4286,3935) 4286,3990 4305.9,4009.9 C1.2 C2.2
  Bottom Layer w25: C19.1 v1@3357,3821.44 ; v1(4109,3285.44) C26.1@4161,3285.44 ; C26.1 C25.1 C24.1 ; C22.1 C14.1 v1@4286,3934.56 ; v1(4286,3935) v1@4286,3934.56 ; v1(4392,3914) 4380.56,3902.56 C23.1 C13.1 4286,3929.56 v1@4286,3934.56 ; L2.1 v1(4679,4031)
  other v1: 4058,3402 4058,3443 4289,3489 4412,3489
AVDD: C10.2 C11.2 C12.2 C13.2 C14.2 C22.2 C23.2 C24.2 C25.2 C26.2 D1_ESD1.2 D1_ESD2.2 D1_ESD3.2 D1_ESD4.2 D1_ESD5.2 L1.1 U1.1 U1.2 U1.3 U1.4 U1.5 U1.6 U1.7 U1.8 U1.17 U1.18 U1.19 U1.21 U1.22 U1.54 U1.56 U1.59 U1.62 U2.5 | length 1205.3
  Top Layer w10: U1.17 U1.18 U1.19 v1@4195.16,3382.69 ; v1@4195.16,3810.16 U1.62 ; v1(4204,3377) 4211.31,3384.31 4222.27,3384.31 4234.53,3396.57 U1.21 U1.22 ; v1@4254.21,3811.21 U1.59 ; v1@4313.27,3810.27 U1.56 ; v1@4352.64,3811.64 U1.54
  Top Layer w20: v1(4057.4,4143.6) U2.5 ; C12.2@4157.43,3337.34 4202.43,3337.34 C11.2 ; C10.2@4202.43,3340.34 v1@4202.43,3375.43
  Top Layer w25: D1_ESD1.2@2512,4228 v1(2512,4271) ; D1_ESD5.2@2818,4222 v1(2818,4265) ; D1_ESD2.2@3122,4227 v1(3122,4270) ; D1_ESD3.2@3426,4228 v1(3426,4271) ; D1_ESD4.2@3730,4226 v1(3730,4269) ; L1.1 v1(4627,4033)
  Bottom Layer w10: v1(4352,3811) v1@4352,3816
  Bottom Layer w20: C26.2 C25.2 C24.2 ; v1(4195,3810) 4195,3830.44 C22.2 C14.2 ; C25.2@4203,3340.56 v1@4203,3376 ; v1(4254,3811) 4254,3845.44 C14.2 ; C13.2@4312,3846.44 C14.2 ; v1(4313,3810) C13.2 C23.2 v1@4357,3816
  other v1: 4149,3376 4120,3419 4134,3809
CBL_SHLD: J2.6 J3.1 J3.4 | length 923.3
  Top Layer w30: v1(4007,4487) 4013.52,4487 J3.1 J3.4
  Bottom Layer w25: J2.6 3402.93,4533.86 3449.02,4579.95 3692.05,4579.95 ; 3785,4487 v1(4007,4487)
  Bottom Layer w30: 3692.05,4579.95 3785,4487
CN_SPI_MISO: J1.9 J4.10 TP6.1 U1.43 | length 3584.2
  Top Layer w8: J1.9@3720.39,3260.61 3823,3158 3834,3158 ; v1(3834,3179) 3834,3158 ; U1.43 4583.1,3694.55 4658,3619.65 4658,3229.33 4509.67,3081 3962,3081 3885,3158 3834,3158
  Top Layer w15: v1(4178,3027) TP6.1@4257,3027
  Bottom Layer w15: J4.10 2626.7,3108 2638.7,3120 3775,3120 v1(3834,3179) 3862,3179 3970,3071 3970,3014 4009,2975 4126,2975 v1(4178,3027)
CN_SPI_MOSI: J1.7 J4.12 TP7.1 U1.34 | length 3708.9
  Top Layer w8: J1.7 3754,3293.76 3754,3308.84 3792.16,3347 3903,3347 4034,3216 4066.43,3216 4084,3198.43 4084,3159 4109,3134 4162,3134 ; v1(4200.5,3160.5) 4188.5,3160.5 4162,3134 ; TP7.1@4520.96,3209 4543.96,3186 ; U1.34 4589.61,3517.39 4608,3499 4608,3250.04 4543.96,3186 ; 4162,3134 4491.96,3134 4543.96,3186
  Top Layer w15: v1(2698,2859) v1(2698,3158)
  Bottom Layer w15: J4.12 v1(2698,3158) ; v1(2698,2859) v1@2701,2862 ; v1@2698,2864 4062,2864 4208,3010 4208,3153 v1(4200.5,3160.5)
CN_SPI_SCK: J1.5 J4.14 TP8.1 U1.40 | length 3273.5
  Top Layer w8: J1.5 3799.13,3250.87 3867,3183 3972.68,3183 4042,3113.68 ; v1(4020,3105) 4033.32,3105 4042,3113.68 ; U1.40 4596.5,3635.5 4642,3590 4642,3235.96 4503.04,3097 4058.68,3097 4042,3113.68
  Top Layer w15: v1@4018,3027 TP8.1
  Bottom Layer w15: J4.14 2586,3208 2599,3195 3300.77,3195 3310.77,3205 3952.8,3205 3994.92,3162.88 3994.92,3130.08 v1(4020,3105) ; v1(4017,3026) v1@4017,3102
DGND: C8.1 C9.1 C21.1 J1.1 J1.2 J1.15 J1.16 J1.31 J1.32 J4.17 J4.18 J4.19 J4.20 L2.2 U1.31 U1.33 U1.41 U1.49 U1.51 | length 812.6
  Top Layer w10: U1.51 4411.69,3894.11 4423.95,3906.37 4448.37,3906.37 ; U1.31 4433.06,3425.15 4433.06,3394.88 4443.95,3384 v1(4509,3384) ; U1.49 4451.06,3909.06 v1(4482,3940) ; v1@4461,3655 v1(4461.18,3655.18) U1.41 ; v1(4467,3512) 4481.3,3497.7 U1.33
  Top Layer w25: v1@3287.32,3231.32 J1.31 ; v1@3602,3087 v1(3602.28,3086.72) J1.16 ; v1(3602,3232) 3602.28,3232.28 J1.15 ; J1.2 3900,3010 v1(3911,2999) ; J1.1 v1(3911,3288)
  Bottom Layer w20: C8.1@4482,3903.56 v1(4482,3940)
  Bottom Layer w25: C8.1@4482,3903.56 C21.1 C9.1 ; v1(4679,3911) L2.2
  other v1: 3287,3077 3385,3151 3290,3221 2416,3312 2417,3357
DVDD: C8.2 C9.2 C21.2 J1.41 J1.42 J1.43 J1.44 J4.1 J4.2 J4.3 J4.4 L1.2 R1.2 R18.1 U1.48 U1.50 | length 391.5
  Top Layer w10: U1.50 4433.14,3862.08 4433.14,3831.81 4457.95,3807 v1(4460,3807) ; 4508.64,3807 U1.48@4521.93,3793.71
  Top Layer w15: v1(4460,3807) 4508.64,3807
  Top Layer w25: R18.1 4553,3351 v1(4568,3336) ; v1(4627,3913) L1.2
  Bottom Layer w20: v1(4460,3807) 4434,3833 R1.2 4435.98,3848.44 C21.2 C9.2
  other v1: 2415,2909 2415,2953 3052,3076 3092,3076 3073,3160 3052,3229 3092,3229
ECG_GPIO1: J1.24 U1.42 | length 2075.4
  Top Layer w8: J1.24 3444.8,2957.2 3489.5,2912.5 v1(4602.5,2912.5) ; U1.42 4568.13,3674.87 v1(4579,3664)
  Bottom Layer w8: v1@4583,3671 4624.5,3629.5 4624.5,2955.85 4602.5,2933.85 v1(4602.5,2912.5)
ECG_GPIO2: J1.26 J4.8 U1.44 | length 3245.2
  Top Layer w8: v1(3426,3071) 3405.43,3050.43 J1.26 3405.43,2965.95 3483.37,2888 4612.65,2888 4627,2902.35 4627,2916 v1(4646,2935) ; U1.44 4524.69,3711.47 4588.8,3711.47 4600.28,3700 4620,3700 4641,3679 v1(4636,3679)
  Bottom Layer w8: v1(4636,3679) 4646,3669 v1(4646,2935)
  Bottom Layer w15: J4.8 2501.54,3050 3405,3050 v1(3426,3071)
ECG_GPIO3: J1.28 U1.45 | length 2359.4
  Top Layer w8: J1.28@3366.06,2997 3366.06,2972.44 3472,2866.5 v1@4639,2866.5 ; U1.45@4518,3734 4575.93,3734 4582.45,3727.47 4595.43,3727.47 4604.9,3718 v1(4643,3718)
  Bottom Layer w8: v1(4639,2872) 4639,2893.35 4670.5,2924.85 4670.5,2945.15 4664,2951.65 4664,3707 4645,3726 4643,3724 v1(4643,3718)
ECG_GPIO4: J1.30 U1.46 | length 2460.9
  Top Layer w8: J1.30@3326.69,2981.31 3463,2845 v1@4603,2845
  Top Layer w10: U1.46 4607.39,3753.61 v1(4613,3748) ; v1(4603,2841) v1@4603,2845
  Bottom Layer w10: v1(4603,2841) 4603,2845 4601.5,2846.5 4649.56,2846.5 4687.5,2884.44 4687.5,3719.56 4655.56,3751.5 v1@4613,3751.5
ECG_START: J1.10 J4.11 U1.38 | length 3206.2
  Top Layer w8: J1.10 3720.39,2980.61 3740,2961 v1@4595,2961 ; U1.38 4565.87,3596.13 v1(4593,3569)
  Top Layer w15: v1(2415,3147) v1(2640,2922) ; J1.10@3719,3011.39 v1(3719,3080)
  Bottom Layer w8: v1(4600,2966) v1@4600,3562 ; v1@4600,3569 v1@4600,3574
  Bottom Layer w15: J4.11 2404,3158 v1(2415,3147) ; v1(2640,2922) 3517,2922 3675,3080 v1(3719,3080)
LEADIN1: C15.2 D1_ESD1.1 D2_ESD1.2 R15.1 R20_ESD1.2 | length 1195.9
  Top Layer w20: R15.1@3249,3674.88 C15.2
  Top Layer w25: D2_ESD1.2@2468.86,4167.06 R20_ESD1.2
  Top Layer w30: R20_ESD1.2 2536,4137.06 2536,3962 2634,3864 3138,3864 3203,3799 3203,3772.36 3242.92,3732.44 C15.2
LEADIN2: C16.2 D1_ESD2.1 D2_ESD2.2 R13.1 R20_ESD2.2 | length 735.4
  Top Layer w20: R13.1@3357.56,3677.11 C16.2
  Top Layer w25: D2_ESD2.2@3078.86,4166.2 R20_ESD2.2
  Top Layer w30: R20_ESD2.2 3132,4122.2 3132,3959 3185,3906 3243,3906 3312,3837 3312,3771.92 3351.48,3732.44 C16.2
LEADIN3: C17.2 D1_ESD3.1 D2_ESD3.2 R11.1 R20_ESD3.2 | length 626.7
  Top Layer w15: D2_ESD3.2@3382.86,4167.06 R20_ESD3.2 ; R11.1@3468,3676.43 C17.2
  Top Layer w30: C17.2 3461.92,3732.44 3431.25,3763.11 3431.25,4118.31 R20_ESD3.2
LEADIN4: C18.2 D1_ESD4.1 D2_ESD4.2 R17.1 R20_ESD4.2 | length 1332.6
  Top Layer w20: v1(3098.44,3732.44) C18.2 R17.1@3138,3676.67 ; D2_ESD4.2@3686.86,4165.06 R20_ESD4.2 3745.94,4127 v1(3724,4127)
  Bottom Layer w30: v1(3098.44,3732.44) 3098.44,3716.56 3193,3622 3517,3622 3724,3829 v1(3724,4127)
LEADIN5: C19.2 D1_ESD5.1 D2_ESD5.2 R10.1 R12.1 R14.1 R16.1 R20_ESD5.2 | length 948.1
  Top Layer w20: D2_ESD5.2@2775.86,4161.6 R20_ESD5.2 2836.4,4125 v1(2812,4125) ; R16.1 v1(3194.34,3709.34) ; R14.1@3305,3675.33 v1(3305,3709.34) ; R12.1@3414,3675.67 v1(3414,3709.34) ; R10.1@3523,3675.33 v1(3523,3709.34)
  Bottom Layer w20: v1(2812,4125) 2812,3990 3013,3789 3114.68,3789 v1(3194.34,3709.34) ; v1@3300.66,3709.34 v1(3305,3709.34) ; v1(3414,3709.34) v1@3414,3710.56
LEADIN_EXT1: J2.10 R19_ESD1.1 | length 506.1
  Top Layer w30: R19_ESD1.1 2654,4489 2751,4586 2923.01,4586 J2.10
LEADIN_EXT2: J2.13 R19_ESD2.1 | length 287.6
  Top Layer w30: R19_ESD2.1 3264,4434 3306.3,4476.3 J2.13
LEADIN_EXT3: J2.14 R19_ESD3.1 | length 335
  Top Layer w30: J2.14@3422.19,4645.67 3431.33,4645.67 3524,4553 3524,4508 3568,4464 R19_ESD3.1
LEADIN_EXT4: J2.15 R19_ESD4.1 | length 462.3
  Top Layer w30: J2.15 3546.33,4645.67 3817.54,4374.46 R19_ESD4.1
LEADIN_EXT5: J2.12 R19_ESD5.1 | length 376.6
  Top Layer w30: R19_ESD5.1@2961,4379 3090,4508 3090,4557 3178.67,4645.67 J2.12
NetC1_1: C1.1 C2.1 U1.55 | length 140.1
  Top Layer w10: U1.55@4333,3863.89 4333,3913
  Top Layer w25: 4333,3913 4333,3935 4342.23,3944.23 C1.1 C2.1
NetC3_2: C3.2 C7.2 U1.24 | length 126.8
  Top Layer w10: C3.2@4293.58,3343.06 U1.24
  Top Layer w25: C3.2 C7.2
NetC4_1: C4.1 U1.28 | length 108.4
  Top Layer w8: U1.28 4372.32,3388.68 4392.35,3368.65 4397.14,3368.65 C4.1@4423.43,3342.36
NetC5_2: C5.2 U1.26 | length 106.9
  Top Layer w8: U1.26 4332.95,3391.05 4376.43,3347.57 C5.2
NetC6_2: C6.2 U1.30 | length 112.4
  Top Layer w8: U1.30 4411.69,3392.21 4438.26,3365.65 4444.14,3365.65 C6.2@4468.43,3341.36
NetC20_1: C20.1 R22.1 R23.2 U1.63 | length 167.2
  Top Layer w10: U1.63 R22.1@4175.47,3930
  Top Layer w20: R23.2@4083.98,3933.44 C20.1 ; C20.1@4136.98,3932.46 R22.1
NetC20_2: C20.2 R21.2 R22.2 U1.61 | length 327
  Top Layer w10: R21.2 R21.2@4034.1,3932.46 ; U1.61 4214.84,3905.16 4216.72,3907.03 4216.72,3968.28
  Top Layer w12: R21.2@4034.1,3932.46 4063.65,3962 4109.44,3962 C20.2
  Top Layer w20: C20.2@4136.98,3989.54 4195.46,3989.54 4216.72,3968.28
NetDS1_ESD1_2: DS1_ESD1.2 R19_ESD1.2 R20_ESD1.1 | length 219
  Top Layer w25: R20_ESD1.1 2624.31,4183.54 R19_ESD1.2 2654,4136.06 DS1_ESD1.2
NetDS1_ESD2_2: DS1_ESD2.2 R19_ESD2.2 R20_ESD2.1 | length 219
  Top Layer w25: R20_ESD2.1 3234.31,4182.69 R19_ESD2.2 3264,4135.2 DS1_ESD2.2
NetDS1_ESD3_2: DS1_ESD3.2 R19_ESD3.2 R20_ESD3.1 | length 219
  Top Layer w25: R20_ESD3.1 3538.31,4183.54 R19_ESD3.2 3567,4182.54 3567,4135.06 DS1_ESD3.2
NetDS1_ESD4_2: DS1_ESD4.2 R19_ESD4.2 R20_ESD4.1 | length 219
  Top Layer w25: R20_ESD4.1 3842.31,4181.54 R19_ESD4.2 3872,4134.06 DS1_ESD4.2
NetDS1_ESD5_2: DS1_ESD5.2 R19_ESD5.2 R20_ESD5.1 | length 219
  Top Layer w25: R20_ESD5.1 2931.31,4178.09 R19_ESD5.2 2961,4130.6 DS1_ESD5.2
NetJ3_3: J3.3 U2.3 U2.4 | length 227.7
  Top Layer w20: U2.4 U2.3
  Top Layer w25: J3.3 4193.24,4351.28 U2.3
NetR10_2: R10.2 U1.9 | length 585.1
  Top Layer w8: 4008,3656.5 4029,3635.5 U1.9
  Top Layer w15: R10.2 3559.24,3618.24 3597.5,3656.5 4008,3656.5
NetR11_2: R11.2 U1.10 | length 658.5
  Top Layer w8: 4002,3626 4012.19,3615.81 U1.10
  Top Layer w15: R11.2@3468.32,3618.01 3506.32,3580 3572,3580 3623,3631 4000,3631 ; 4000,3628 4002,3626
NetR12_2: R12.2 U1.11 | length 719.6
  Top Layer w8: 3997,3605.5 4006.37,3596.13 U1.11
  Top Layer w15: R12.2 3479.58,3553 ; 3479.58,3553.17 3592,3553.17 ; 3595.67,3553 3648.16,3605.5 3997,3605.5
NetR13_2: R13.2 U1.12 | length 782.6
  Top Layer w10: 4000.56,3576.44 U1.12
  Top Layer w15: R13.2 3451.58,3526 ; 3451.58,3526.33 3621.33,3526.33 ; 3621.33,3526 3675.33,3580 3997,3580
NetR14_2: R14.2 U1.13 | length 848.2
  Top Layer w8: 4017,3556.76 U1.13
  Top Layer w15: R14.2@3303,3617.46 3421.46,3499 ; 3421.46,3499.5 3643,3499.5 ; 3643,3499 3698.5,3554.5 4011.24,3554.5
NetR15_2: R15.2 U1.14 | length 936.7
  Top Layer w8: 4016,3528 4025.07,3537.07 U1.14
  Top Layer w15: R15.2@3248,3617.46 3248,3595 3370.33,3472.67 3663.67,3472.67 3719,3528 ; 3719,3529 4016,3529
NetR16_2: R16.2 U1.15 | length 999.8
  Top Layer w8: 4025,3504 4038.39,3517.39 U1.15
  Top Layer w15: 3193.67,3604.66 3352.5,3445.83 3676.83,3445.83 3677,3446 3677.76,3446 3732.76,3501 3734,3501 3736,3503 ; 3194.34,3604.66 R16.2 ; 3736,3503.5 4025,3503.5
NetR17_2: R17.2 U1.16 | length 1060.7
  Top Layer w8: 4041,3478 4060.7,3497.7 U1.16
  Top Layer w15: R17.2 3338.58,3419 3688.53,3419 3747.53,3478 4041,3478
NetR18_2: R18.2 U1.35 | length 249.1
  Top Layer w7: v1(4468,3553) 4483.93,3537.07 U1.35 ; v1(4510,3425) 4552.54,3425 R18.2
  Bottom Layer w7: v1(4468,3553) 4510,3511 v1(4510,3425)
NetR21_1: R21.1 R23.1 U2.1 | length 261.4
  Top Layer w10: R21.1@4026,3984.84 R21.1
  Top Layer w20: R21.1 R23.1
  Top Layer w25: R23.1 4083,4017 4193.24,4127.24 U2.1
pads on no net: J1.4 J1.6 J1.11 J1.12 J1.13 J1.14 J1.17 J1.19 J1.23 J1.25 J1.27 J1.29 J1.33 J1.34 J1.35 J1.36 J1.37 J1.38 J1.39 J1.40 J1.45 J1.46 J1.47 J1.48 J1.49 J1.50 J1.51 J1.52 J1.53 J1.54 J1.55 J1.56 J1.57 J1.58 J1.59 J1.60 J1.61 J1.62 J2.0 J2.1 J2.2 J2.3 J2.4 J2.5 J2.7 J2.8 J2.9 J2.11 J4.5 J4.6 J4.7 U1.27 U1.29 U1.37 U1.60 U1.64

## Polygon pours and split planes (outlines as drawn)
DVDD on Mid-PWR "Mid-PWR-DPWR" (solid, pour order 10): 2940.02,2812 2940.02,3330.3 2940.02,3363.57 2950.03,3373.66 4052.26,3373.66 4253.49,3373.66 4405.66,3526.93 4399.65,3532.98 4399.65,3976.66 4399.65,3978.67 4433.69,4012.96 4438.69,4018 4712,4018 4712,2813.01 4711,2812 3218.33,2812 2926,2812
DVDD on Mid-PWR "Mid-PWR-CN" (solid, pour order 9): 2940.02,2812 2276,2812 2230,2812 2230,3386 2231,3387 2889,3387 2936.68,3387 2950.03,3373.66 2949,3372.63 2949,2812
AVDD on Mid-PWR "Mid-PWR-AVDD" (solid, pour order 12): 2234,2814 2234,4955 4070,4955 4706,4955 4706,4323 4706,2972 4708,2970 4705,2967 4705,2814 2246,2814
DGND on Mid-GND "Mid-GND-DGND" (solid, pour order 11): 2940.02,2813 2940.02,3331.3 2940.02,3364.57 2950.03,3374.66 4052.26,3374.66 4253.49,3374.66 4405.66,3527.93 4399.65,3533.98 4399.65,3977.66 4399.65,3979.67 4433.69,4013.96 4438.69,4019 4712,4019 4712,2814.01 4711,2813 3218.33,2813 2926,2813
DGND on Mid-GND "Mid-GND-CN" (solid, pour order 8): 2939.02,2812 2275,2812 2229,2812 2229,3386 2230,3387 2888,3387 2935.68,3387 2949.03,3373.66 2948,3372.63 2948,2812
AGND on Mid-GND "Mid-GND-AGND" (solid, pour order 7): 2219,2800 2220,2801 2220,4970 4721,4970 4721,2800 2219,2800

## Keep-outs
Keep-Out Layer:
  lines w10: 2219,2800 2219,4969 2220,4970 4721,4970 4721,2800 2219,2800

## Other copper
Top Layer:
  rectangle net AGND: 4030,3304 4087,3458
  rectangle net DVDD: 3034,2963 3109,3334
  rectangle net AVDD: 4051,3647 4120,3822
  rectangle net AVDD: 4051,3766 4369,3822
  rectangle net AGND: 4030,3241 4486,3304
  rectangle net NetC3_2: 4271,3314 4352,3356
  rectangle net AVDD: 4105,3320 4197,3462
  rectangle net AVDD: 4166,3321 4260,3363
  rectangle net AGND: 4202,3474 4433,3551
  rectangle net AGND: 4265,3982 4413,4039
  rectangle net AGND: 4265,3898 4301,4039
  rectangle net AVDD: 4233,3399 4255,3453
  rectangle net AGND: 4272,3839 4293.58,3901
  rectangle net CBL_SHLD: 3991,4474 4219,4613
  region net DGND: 3268,3332 3305,3332 3305,3243 3319,3230 3566,3230 3583,3247 3583,3332 3619,3332 3619,3231 3628,3223 3628,3184 3599,3155 3494,3155 3422.33,3095 3367,3095 3333,3077 3306,3060 3306,2965 3268,2965
Mid-GND:
  pour cut-out: 4486,3357.82 4487,3358.82 4487,3473 4497,3473 4509.29,3460.71 4509.29,3444.29 4486,3421
  pour cut-out: 4449.99,3958.31 4465.07,3973.39 4465.07,3974.07 4465.62,3974.07 4469.94,3969.75 4452.25,3952.06 4451.32,3952.06 4447.19,3956.19
  pour cut-out: 4426,3826.22 4426,3787.06 4427.08,3788.14 4432.49,3788.14 4432.49,3825.86
  pour cut-out: 4426,3641.74 4426.05,3641.79 4426.05,3667.62 4432.55,3667.62 4432.49,3667.57 4432.49,3640.43
Bottom Layer:
  rectangle net LEADIN5: 3167,3689 3550,3735
  rectangle net AGND: 4030,3237 4285,3308
  rectangle net AVDD: 4106,3320 4264,3462
  rectangle net AGND: 4190,3883 4407,3937
  rectangle net AVDD: 4123,3795 4373,3867
  rectangle net CBL_SHLD: 3777,4451 4015,4509
  rectangle net DVDD: 2292,2890 2549,2975
  rectangle net DGND: 2294,3293 2543,3373

## Silkscreen, mask and mechanical layers (free items; w line width, h text height)
Top Overlay:
  text "GND" at 4040,4311 h30 r90
  text "DRIVE" at 4271,4303 h30 r90
  text "Mark Newcomb" at 4636,4164 h40 r90
  text "Rev 0.2" at 4500,4162 h40 r90
  text "April 3, 2013" at 4566,4162 h40 r90
  text "ezDSP ECG Expansion" at 4436,4161 h40 r90